# EAGLE board SOT23_6-DIP (EAGLE 8.5.2)
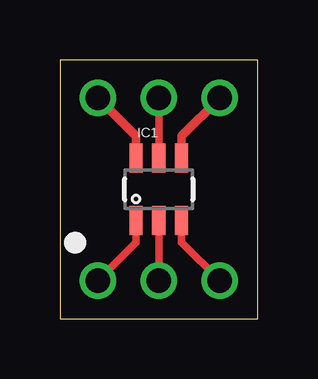
[diagram p0: board, top side]
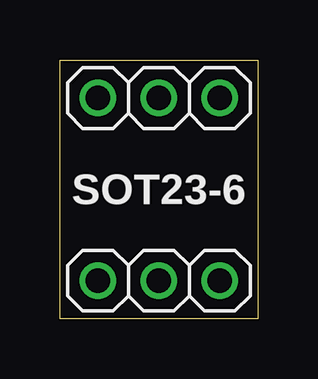
[diagram p1: board, bottom side, seen from below]

Size 8.26 x 10.79 mm. Coordinates in mm from the lower left corner, seen from the top.
Outline: 0,0 8.26,0 8.26,10.79 0,10.79 0,0
Copper layers (1*16): Top 0.035mm / dielectric 1.6mm / Bottom 0.035mm
Design rules "Elecrow_2-layer_PCB_eagle_rule *": minimum track width 6mil, minimum drill 12mil, track to track 6mil, track to pad 6mil, pad to pad 6mil, via to via 8mil, smd to smd 0mil, copper to edge 20mil, drill to drill 10mil, minimum pad ring 1mil, minimum via ring 6mil, stop-mask expansion 0mil, vias tented up to drill 100mil, thermal gap 10mil

## Footprints (pad centres in the part's own frame; a part is rotated, then mirrored left to right if it is on the bottom)
SOT23-6 = smd 0.55 x 1.2: 1 -0.95,-1.3; 2 0,-1.3; 3 0.95,-1.3; 4 0.95,1.3; 5 0,1.3; 6 -0.95,1.3
ADAPTER-6 = drill 1.016: 1 1.587,1.587; 2 4.128,1.587; 3 6.668,1.587; 4 6.668,9.207; 5 4.128,9.207; 6 1.587,9.207

## Placement (x,y rotation side)
IC1  MCP16251T-I/CH  [SOT23-6]  4.13,5.4 0 top
SOT23-6  ADAPTER-6  [ADAPTER-6]  0,0 0 top

## Library data of the parts
IC1 = my-power; ATTR: True disconnect
SOT23-6 = my-pinhead

## Nets
N$1: IC1.1 SOT23-6.1
N$2: IC1.2 SOT23-6.2
N$3: IC1.3 SOT23-6.3
N$4: IC1.6 SOT23-6.6
N$5: IC1.5 SOT23-6.5
N$6: IC1.4 SOT23-6.4

## Tracks (layer width: path | path; a pad name or v marks a point on that pad's centre or on a via)
N$1
  Top 0.305: IC1.1 3.18,3.18 SOT23-6.1
N$2
  Top 0.305: SOT23-6.2 IC1.2
N$3
  Top 0.305: IC1.3 5.08,3.18 SOT23-6.3
N$4
  Top 0.356: SOT23-6.6 3.18,7.62 IC1.6
N$5
  Top 0.305: IC1.5 SOT23-6.5
N$6
  Top 0.356: SOT23-6.4 5.08,7.62 IC1.4